# EAGLE board Program Counter (EAGLE 9.5.2)
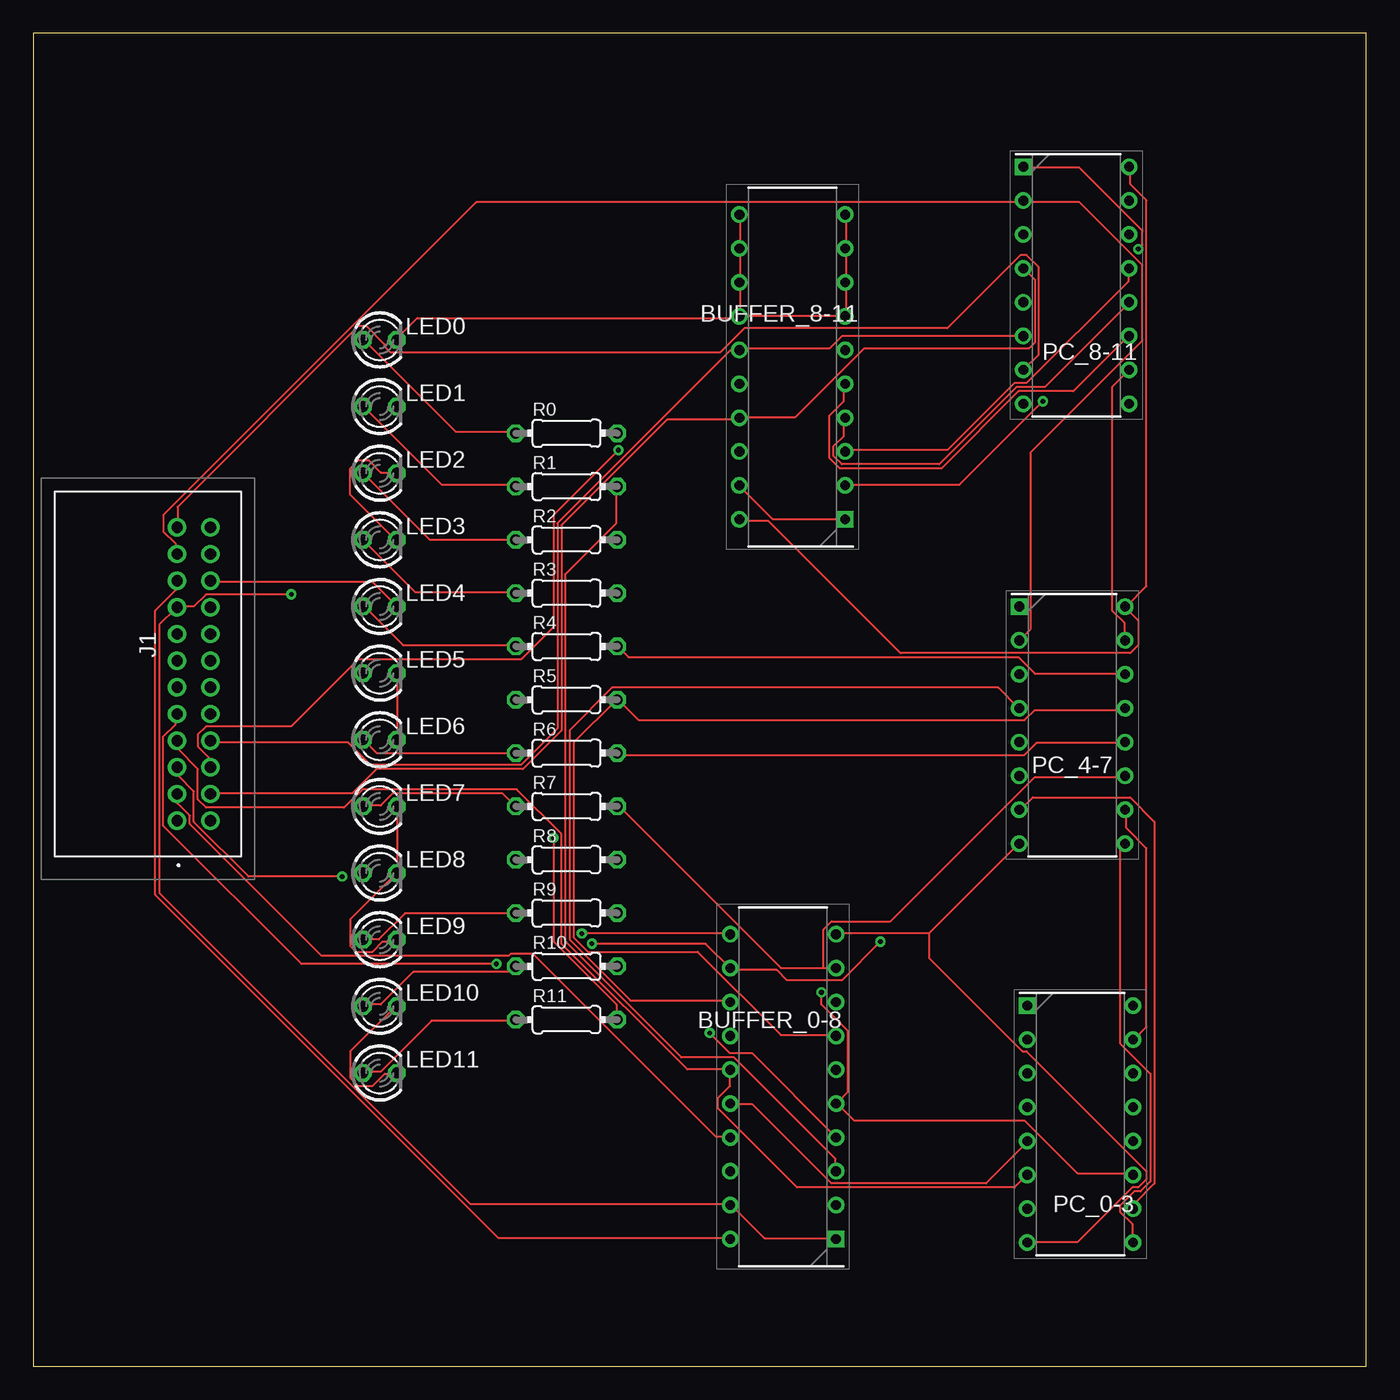
[diagram p0: board, top side]
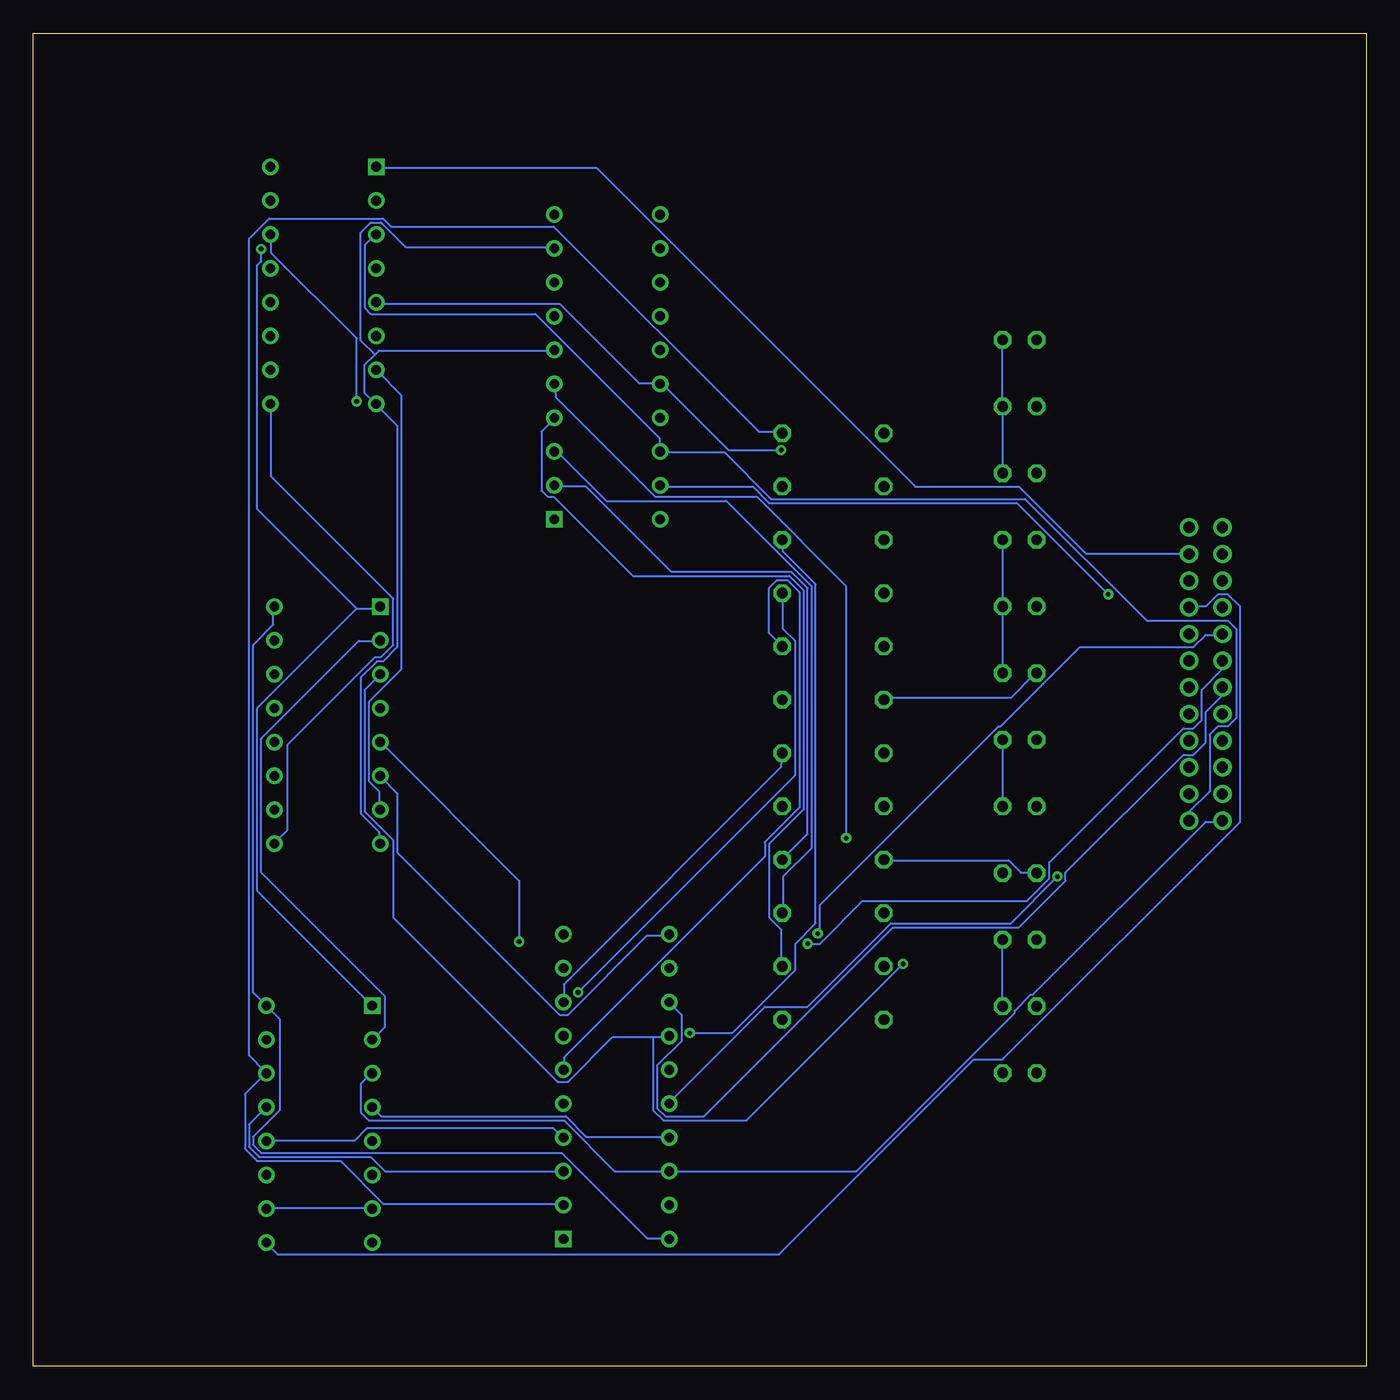
[diagram p1: board, bottom side, seen from below]

Size 100 x 100 mm. Coordinates in mm from the lower left corner, seen from the top.
Outline: 0,0 100,0 100,100 0,100 0,0
Copper layers (1*16): Top 0.035mm / dielectric 1.5mm / Bottom 0.035mm
Design rules "default": minimum track width 6mil, minimum drill 0.35mm, track to track 6mil, track to pad 6mil, pad to pad 6mil, via to via 6mil, smd to smd 6mil, copper to edge 40mil, drill to drill 6mil, minimum pad ring 10mil, minimum via ring 8mil, stop-mask expansion 4mil, vias tented up to drill 0mil, thermal gap 10mil

## Footprints (pad centres in the part's own frame; a part is rotated, then mirrored left to right if it is on the bottom)
DIP794W53P254L2540H508Q20N = drill 0.73 pad 1.13 square: 1 -3.97,11.43 | drill 0.73 pad 1.13: 2 -3.97,8.89; 3 -3.97,6.35; 4 -3.97,3.81; 5 -3.97,1.27; 6 -3.97,-1.27; 7 -3.97,-3.81; 8 -3.97,-6.35; 9 -3.97,-8.89; 10 -3.97,-11.43; 11 3.97,-11.43; 12 3.97,-8.89; 13 3.97,-6.35; 14 3.97,-3.81; 15 3.97,-1.27; 16 3.97,1.27; 17 3.97,3.81; 18 3.97,6.35; 19 3.97,8.89; 20 3.97,11.43
559592430 = drill 0.85 pad 1.381: 1 0,0; 2 0,-2.5; 3 2,0; 4 2,-2.5; 5 4,0; 6 4,-2.5; 7 6,0; 8 6,-2.5; 9 8,0; 10 8,-2.5; 11 10,0; 12 10,-2.5; 13 12,0; 14 12,-2.5; 15 14,0; 16 14,-2.5; 17 16,0; 18 16,-2.5; 19 18,0; 20 18,-2.5; 21 20,0; 22 20,-2.5; 23 22,0; 24 22,-2.5
LED3MM = drill 0.813 octagon: A -1.27,0; K 1.27,0
DIP794W53P254L1930H508Q16N = drill 0.73 pad 1.13 square: 1 -3.97,8.89 | drill 0.73 pad 1.13: 2 -3.97,6.35; 3 -3.97,3.81; 4 -3.97,1.27; 5 -3.97,-1.27; 6 -3.97,-3.81; 7 -3.97,-6.35; 8 -3.97,-8.89; 9 3.97,-8.89; 10 3.97,-6.35; 11 3.97,-3.81; 12 3.97,-1.27; 13 3.97,1.27; 14 3.97,3.81; 15 3.97,6.35; 16 3.97,8.89
0204/7 = drill 0.813 octagon: 1 -3.81,0; 2 3.81,0

## Placement (x,y rotation side)
BUFFER_0-8  SN74HC541N  [DIP794W53P254L2540H508Q20N]  56.25,20.97 180 top
BUFFER_8-11  SN74HC541N  [DIP794W53P254L2540H508Q20N]  56.95,74.97 180 top
J1  55959-2430  [559592430]  10.79,40.93 90 top
LED0  [LED3MM]  26,77 0 top
LED1  YELLOW  [LED3MM]  26,72 0 top
LED2  YELLOW  [LED3MM]  26,67 0 top
LED3  YELLOW  [LED3MM]  26,62 0 top
LED4  YELLOW  [LED3MM]  26,57 0 top
LED5  YELLOW  [LED3MM]  26,52 0 top
LED6  YELLOW  [LED3MM]  26,47 0 top
LED7  YELLOW  [LED3MM]  26,42 0 top
LED8  YELLOW  [LED3MM]  26,37 0 top
LED9  YELLOW  [LED3MM]  26,32 0 top
LED10  YELLOW  [LED3MM]  26,27 0 top
LED11  YELLOW  [LED3MM]  26,22 0 top
PC_0-3  SN74HC161N  [DIP794W53P254L1930H508Q16N]  78.55,18.16 0 top
PC_4-7  SN74HC161N  [DIP794W53P254L1930H508Q16N]  77.95,48.1 0 top
PC_8-11  SN74HC161N  [DIP794W53P254L1930H508Q16N]  78.25,81.1 0 top
R0  220  [0204/7]  40,70 0 top
R1  220  [0204/7]  40,66 0 top
R2  220  [0204/7]  40,62 0 top
R3  220  [0204/7]  40,58 0 top
R4  220  [0204/7]  40,54 0 top
R5  220  [0204/7]  40,50 0 top
R6  220  [0204/7]  40,46 0 top
R7  220  [0204/7]  40,42 0 top
R8  220  [0204/7]  40,38 0 top
R9  220  [0204/7]  40,34 0 top
R10  220  [0204/7]  40,30 0 top
R11  220  [0204/7]  40,26 0 top

## Library data of the parts
BUFFER_0-8 BUFFER_8-11 = SamacSys_Parts; DESCRIPTION: Octal Buffers And Line Drivers With 3-State Outputs; HEIGHT: 5.08mm; MANUFACTURER_NAME: Texas Instruments; MANUFACTURER_PART_NUMBER: SN74HC541N; MOUSER_PART_NUMBER: 595-SN74HC541N; MOUSER_PRICE-STOCK: https://www.mouser.com/Search/Refine.aspx?Keyword=595-SN74HC541N
J1 = SamacSys_Parts; DESCRIPTION: Headers & Wire Housings 24 Ckt R.A. Header; HEIGHT: 11.95mm; MANUFACTURER_NAME: Molex; MANUFACTURER_PART_NUMBER: 55959-2430; MOUSER_PART_NUMBER: 538-55959-2430; MOUSER_PRICE-STOCK: https://www.mouser.com/Search/Refine.aspx?Keyword=538-55959-2430
LED0 LED1-LED11 = led
PC_0-3 PC_4-7 PC_8-11 = SamacSys_Parts; DESCRIPTION: SYNCHRONOUS 4-BIT BINARY COUNTERS; HEIGHT: 5.08mm; MANUFACTURER_NAME: Texas Instruments; MANUFACTURER_PART_NUMBER: SN74HC161N; MOUSER_PART_NUMBER: 595-SN74HC161N; MOUSER_PRICE-STOCK: https://www.mouser.com/Search/Refine.aspx?Keyword=595-SN74HC161N
R0 R1-R11 = rcl; SPICEPREFIX: R

## Nets
B0: BUFFER_0-8.18 J1.1 PC_0-3.3
B1: BUFFER_0-8.17 J1.3 PC_0-3.4
B2: BUFFER_0-8.16 J1.5 PC_0-3.5
B3: BUFFER_0-8.15 J1.7 PC_0-3.6
B4: BUFFER_0-8.14 J1.9 PC_4-7.3
B5: BUFFER_0-8.13 J1.11 PC_4-7.4
B6: BUFFER_0-8.12 J1.13 PC_4-7.5
B7: BUFFER_0-8.11 J1.15 PC_4-7.6
B8: BUFFER_8-11.18 J1.2 PC_8-11.3
B9: BUFFER_8-11.17 J1.4 PC_8-11.4
B10: BUFFER_8-11.16 J1.6 PC_8-11.5
B11: BUFFER_8-11.15 J1.8 PC_8-11.6
CE: J1.23 PC_0-3.7 PC_0-3.10 PC_4-7.7 PC_8-11.7
CLK: J1.21 PC_0-3.2 PC_4-7.2 PC_8-11.2
GND: BUFFER_0-8.10 BUFFER_8-11.6 BUFFER_8-11.7 BUFFER_8-11.8 BUFFER_8-11.9 BUFFER_8-11.10 BUFFER_8-11.11 BUFFER_8-11.12 BUFFER_8-11.13 BUFFER_8-11.14 J1.20 LED0.K LED1.K LED2.K LED3.K LED4.K LED5.K LED6.K LED7.K LED8.K LED9.K LED10.K LED11.K PC_0-3.8 PC_4-7.8 PC_8-11.8
JMP: J1.18 PC_0-3.9 PC_4-7.9 PC_8-11.9
N$2: PC_0-3.15 PC_4-7.10
N$3: PC_4-7.15 PC_8-11.10
N$5: LED0.A R0.1
N$6: LED1.A R1.1
N$7: LED2.A R2.1
N$9: LED3.A R3.1
N$10: LED4.A R4.1
N$11: LED5.A R5.1
N$12: LED6.A R6.1
N$13: LED7.A R7.1
N$14: LED8.A R8.1
N$15: LED9.A R9.1
N$16: LED10.A R10.1
N$17: LED11.A R11.1
PC0: BUFFER_0-8.2 PC_0-3.14 R0.2
PC1: BUFFER_0-8.3 PC_0-3.13 R1.2
PC2: BUFFER_0-8.4 PC_0-3.12 R2.2
PC3: BUFFER_0-8.5 PC_0-3.11 R3.2
PC4: BUFFER_0-8.6 PC_4-7.14 R4.2
PC5: BUFFER_0-8.7 PC_4-7.13 R5.2
PC6: BUFFER_0-8.8 PC_4-7.12 R6.2
PC7: BUFFER_0-8.9 PC_4-7.11 R7.2
PC8: BUFFER_8-11.2 PC_8-11.14 R8.2
PC9: BUFFER_8-11.3 PC_8-11.13 R9.2
PC10: BUFFER_8-11.4 PC_8-11.12 R10.2
PC11: BUFFER_8-11.5 PC_8-11.11 R11.2
PCO: BUFFER_0-8.1 BUFFER_0-8.19 BUFFER_8-11.1 BUFFER_8-11.19 J1.17
RST: J1.22 PC_0-3.1 PC_4-7.1 PC_8-11.1
VCC: BUFFER_0-8.20 BUFFER_8-11.20 J1.19 PC_0-3.16 PC_4-7.16 PC_8-11.16

## Tracks (layer width: path | path; a pad name or v marks a point on that pad's centre or on a via)
B0
  Bottom 0.152: PC_0-3.3 74.68,21.95 75.44,21.18 75.44,19.05 74.83,18.44 60.2,18.44 56.39,14.63 52.43,14.63 BUFFER_0-8.18 38.25,14.63 26.36,26.52 26.36,26.67 25.15,27.89 24.99,27.89 12.04,40.84 10.82,40.84 J1.1
B1
  Top 0.152: J1.3 10.82,42.82 10.82,42.22 11.73,41.3 11.73,40.69 21.64,30.79 35.66,30.79 35.81,30.94 37.49,30.94 51.21,17.22 52.27,17.22 BUFFER_0-8.17
  Bottom 0.152: BUFFER_0-8.17 52.43,17.22 58.52,17.22 60.05,18.75 73.91,18.75 74.52,19.36 PC_0-3.4
B2  (via drill 0.35)
  Top 0.152: BUFFER_0-8.16 52.43,19.66 53.95,19.66 59.89,13.72 71.48,13.72 74.52,16.76 PC_0-3.5 | v23.16,36.73 16.15,36.73 12.04,40.84 12.04,43.13 10.82,44.35 10.82,44.81 J1.5
  Bottom 0.152: v23.16,36.73 26.67,33.22 35.66,33.22 41.91,26.98 45.11,26.98 52.27,19.81 BUFFER_0-8.16
B3
  Top 0.152: PC_0-3.6 74.52,14.33 73.61,13.41 57.3,13.41 51.36,19.36 51.36,20.12 52.27,21.03 52.27,22.1 BUFFER_0-8.15 49.07,22.25 39.62,31.7 39.62,39.93 36.27,43.28 24.69,43.28 23.32,41.91 12.95,41.91 12.34,42.52 12.34,44.81 10.82,46.33 10.82,46.79 J1.7
B4  (via drill 0.35)
  Top 0.152: v34.75,30.18 20.12,30.18 9.75,40.54 9.75,47.24 10.67,48.16 10.67,48.92 J1.9
  Bottom 0.152: 53.49,24.69 56.54,24.69 59.89,21.34 60.66,21.34 73,33.68 73,39.47 75.13,41.6 75.13,50.75 74.07,51.82 PC_4-7.3 | 53.49,24.69 52.43,24.69 BUFFER_0-8.14 | v34.75,30.18 46.48,18.44 52.73,18.44 53.49,19.2 53.49,24.69
B5
  Top 0.152: BUFFER_0-8.13 52.27,27.43 44.81,27.43 40.23,32 40.23,47.7 43.43,50.9 72.39,50.9 73.91,49.38 PC_4-7.4
  Bottom 0.152: J1.11 10.82,50.9 10.82,50.29 12.04,49.07 12.04,46.79 12.95,45.87 13.72,45.87 22.55,37.03 22.55,36.42 26.06,32.92 35.51,32.92 49.68,18.75 52.58,18.75 53.19,19.36 53.19,22.55 51.36,24.38 51.36,26.36 52.27,27.28 BUFFER_0-8.13
B6  (via drill 0.35)
  Top 0.152: v63.55,31.85 60.66,28.96 56.54,28.96 55.78,29.72 52.43,29.72 BUFFER_0-8.12 50.44,31.7 v41.91,31.7
  Bottom 0.152: v63.55,31.85 63.55,36.42 73.91,46.79 PC_4-7.5 | v41.91,31.7 41,31.7 37.8,34.9 25.45,34.9 23.77,36.58 23.77,37.8 13.72,47.85 12.95,47.85 12.34,48.46 12.34,50.75 10.82,52.27 10.82,52.88 J1.13
B7  (via drill 0.35)
  Top 0.152: v41.15,32.46 52.27,32.46 BUFFER_0-8.11
  Bottom 0.152: BUFFER_0-8.11 52.43,32.31 53.95,32.31 59.89,26.36 60.5,26.36 72.69,38.56 72.69,42.98 73.91,44.2 PC_4-7.6 | v41.15,32.46 41,32.61 41,34.59 27.58,48.01 27.43,48.01 21.49,53.95 12.95,53.95 12.04,54.86 10.82,54.86 J1.15
B8
  Bottom 0.152: PC_8-11.3 74.37,84.89 75.13,84.12 75.13,79.4 74.68,78.94 62.33,78.94 53.03,69.65 53.03,68.73 BUFFER_8-11.18 52.88,68.58 48.16,68.58 44.65,65.08 25.6,65.08 16.46,55.93 10.36,55.93 9.75,55.32 9.75,48.62 10.36,48.01 11.12,48.01 11.73,47.4 11.73,43.13 13.26,41.6 13.26,41 J1.2
B9
  Top 0.152: PC_8-11.4 74.37,82.3 75.13,81.53 75.13,76.81 74.68,76.35 62.33,76.35 57.15,71.17 53.03,71.17 BUFFER_8-11.17 52.88,71.02 47.55,71.02 39.62,63.09 39.62,47.7 36.73,44.81 25.76,44.81 23.93,42.98 13.41,42.98 J1.4
B10  (via drill 0.35)
  Top 0.152: v43.89,68.73 39.01,63.86 39.01,55.47 36.58,53.03 24.38,53.03 19.36,48.01 12.95,48.01 12.34,47.4 12.34,46.48 13.26,45.57 13.26,44.96 J1.6
  Bottom 0.152: PC_8-11.5 74.22,79.7 60.5,79.7 54.56,73.76 53.03,73.76 BUFFER_8-11.16 52.88,73.76 47.85,68.73 v43.89,68.73
B11
  Top 0.152: PC_8-11.6 74.22,77.27 60.66,77.27 59.74,76.35 53.03,76.35 BUFFER_8-11.15 52.88,76.2 52.27,76.2 39.32,63.25 39.32,47.85 36.58,45.11 25.3,45.11 23.62,46.79 13.41,46.79 J1.8
CE
  Top 0.152: J1.23 10.82,62.94 10.82,64.47 24.38,78.03 24.99,78.03 26.36,76.66 26.36,76.5 26.82,76.05 51.51,76.05 53.34,77.88 68.58,77.88 74.07,83.36 74.52,83.36 75.44,82.45 75.44,75.89 74.37,74.83 PC_8-11.7 | PC_0-3.10 82.6,11.89 82.6,12.19 84.12,13.72 84.12,40.84 82.3,42.67 74.98,42.67 74.07,41.76 PC_4-7.7
  Bottom 0.152: PC_0-3.7 74.68,11.89 82.45,11.89 PC_0-3.10 | PC_4-7.7 74.07,41.76 74.07,43.13 74.83,43.89 74.83,49.84 72.39,52.27 72.39,72.85 74.22,74.68 PC_8-11.7
CLK
  Top 0.152: PC_4-7.2 74.07,54.56 74.83,55.32 74.83,68.58 83.21,76.96 83.21,82.6 78.49,87.33 74.37,87.33 PC_8-11.2 74.22,87.33 33.22,87.33 9.75,63.86 9.75,62.64 10.67,61.72 10.67,60.96 J1.21
  Bottom 0.152: PC_4-7.2 74.07,54.41 75.59,54.41 82.91,47.09 82.91,37.03 73.61,27.74 73.61,25.45 74.52,24.54 PC_0-3.2
GND
  Top 0.152: 67.21,32.46 60.35,32.46 BUFFER_0-8.10 | 67.21,32.46 73.91,39.17 PC_4-7.8 | 67.21,32.46 67.21,30.63 74.22,23.62 74.52,23.62 83.52,14.63 83.52,14.02 82.91,13.41 82.45,13.41 78.33,9.3 74.68,9.3 PC_0-3.8 | 53.03,78.79 53.03,81.23 BUFFER_8-11.13 53.03,81.38 53.03,83.82 BUFFER_8-11.12 53.03,83.97 53.03,86.26 BUFFER_8-11.11 | BUFFER_8-11.10 60.96,86.26 60.96,83.97 BUFFER_8-11.9 60.96,83.82 60.96,81.38 BUFFER_8-11.8 60.96,81.23 60.96,78.79 BUFFER_8-11.7 60.81,78.79 53.03,78.79 | 53.03,78.79 BUFFER_8-11.14 52.88,78.64 28.8,78.64 27.28,77.11 LED0.K | LED11.K 27.13,21.95 26.36,21.95 25.45,21.03 24.38,21.03 23.77,21.64 23.77,23.62 27.13,26.98 LED10.K | LED7.K 27.28,41.91 27.28,37.03 LED8.K 27.13,36.88 23.77,33.53 23.77,31.55 24.23,31.09 25.45,31.09 26.21,31.85 27.13,31.85 LED9.K | LED6.K 27.28,47.09 27.28,51.97 LED5.K | J1.20 13.41,58.83 25.45,58.83 27.13,57.15 LED4.K | LED2.K 27.13,67.06 26.06,67.06 25.15,67.97 24.38,67.97 23.77,67.36 23.77,65.38 27.13,62.03 LED3.K
  Bottom 0.152: 74.37,75.89 75.13,75.13 75.13,73 74.37,72.24 PC_8-11.8 74.22,72.08 72.69,70.56 72.69,53.95 73.76,52.88 74.22,52.88 75.44,51.66 75.44,41.45 74.07,40.08 74.07,39.32 PC_4-7.8 | 74.37,75.89 74.07,76.2 60.96,76.2 BUFFER_8-11.6 | 74.37,75.89 75.44,76.96 75.44,85.04 74.68,85.8 73.91,85.8 72.08,83.97 60.96,83.97 BUFFER_8-11.9 | LED9.K 27.28,31.85 27.28,27.13 LED10.K | LED7.K 27.28,42.06 27.28,46.94 LED6.K | LED2.K 27.28,67.06 27.28,71.93 LED1.K 27.28,72.08 27.28,76.96 LED0.K | LED3.K 27.28,61.87 27.28,57.15 LED4.K 27.28,52.12 LED5.K
JMP
  Top 0.152: PC_0-3.9 82.45,9.3 82.45,10.67 81.53,11.58 81.53,12.04 82.6,13.11 83.06,13.11 83.82,13.87 83.82,21.95 81.53,24.23 81.53,38.86 81.84,39.17 PC_4-7.9
  Bottom 0.152: PC_8-11.9 82.14,72.08 82.14,66.75 73,57.61 73,54.1 73.91,53.19 74.37,53.19 80.92,46.63 80.92,40.23 81.84,39.32 PC_4-7.9 | J1.18 13.26,57 12.04,57 11.12,57.91 10.36,57.91 9.45,57 9.45,40.84 27.28,23.01 29.41,23.01 44.04,8.38 81.69,8.38 82.45,9.14 PC_0-3.9
N$2
  Top 0.152: PC_4-7.10 81.99,41.6 81.99,40.39 83.52,38.86 83.52,25.45 82.6,24.54 PC_0-3.15
N$3
  Top 0.152: PC_4-7.15 81.84,54.56 81.84,55.78 80.92,56.69 80.92,73.46 82.14,74.68 PC_8-11.10
N$5
  Top 0.152: R0.1 36.12,70.1 31.7,70.1 24.84,76.96 LED0.A
N$6
  Top 0.152: R1.1 36.12,66.14 30.63,66.14 24.84,71.93 LED1.A
N$7
  Top 0.152: R2.1 36.12,62.03 29.72,62.03 24.84,66.9 LED2.A
N$9
  Top 0.152: R3.1 36.12,58.06 28.65,58.06 24.84,61.87 LED3.A
N$10
  Top 0.152: R4.1 36.12,54.1 27.74,54.1 24.84,57 LED4.A
N$11
  Bottom 0.152: R5.1 36.12,50.14 26.67,50.14 24.84,51.97 LED5.A
N$12
  Top 0.152: R6.1 36.12,46.02 25.76,46.02 24.84,46.94 LED6.A
N$13
  Top 0.152: LED7.A 24.84,42.06 26.06,42.06 26.98,42.98 35.2,42.98 36.12,42.06 R7.1
N$14
  Bottom 0.152: LED8.A 24.84,37.03 25.91,37.03 26.82,37.95 36.12,37.95 R8.1
N$15
  Top 0.152: LED9.A 24.84,32 25.91,32 27.89,33.98 36.12,33.98 R9.1
N$16
  Top 0.152: LED10.A 24.84,27.13 26.06,27.13 28.5,29.57 35.81,29.57 36.12,29.87 R10.1
N$17
  Top 0.152: LED11.A 24.84,22.1 26.06,22.1 29.87,25.91 36.12,25.91 R11.1
PC0
  Bottom 0.152: BUFFER_0-8.2 60.35,12.19 73.76,12.19 76.96,15.39 83.21,15.39 84.12,16.31 84.12,20.42 82.6,21.95 PC_0-3.14 82.6,22.1 83.82,23.32 83.82,84.58 82.3,86.11 73.76,86.11 73.15,85.5 60.96,85.5 45.57,70.1 43.89,70.1 R0.2
PC1
  Top 0.152: R1.2 43.74,65.99 43.74,63.25 39.93,59.44 39.93,31.85 48.62,23.16 52.58,23.16 60.2,15.54 60.2,14.63 BUFFER_0-8.3
  Bottom 0.152: BUFFER_0-8.3 60.35,14.63 73.61,14.63 74.68,15.7 83.06,15.7 83.82,16.46 83.82,18.14 82.6,19.36 PC_0-3.13
PC2  (via drill 0.35)
  Top 0.152: v50.75,24.99 52.27,23.47 53.95,23.47 60.2,17.22 BUFFER_0-8.4
  Bottom 0.152: PC_0-3.12 82.45,16.92 75.89,16.92 74.98,17.83 60.96,17.83 60.35,17.22 BUFFER_0-8.4 | v50.75,24.99 47.55,24.99 42.82,29.72 42.82,31.7 41.3,33.22 41.3,58.67 43.74,61.11 43.74,61.87 R2.2
PC3  (via drill 0.35)
  Top 0.152: PC_0-3.11 82.45,14.48 78.33,14.48 74.37,18.44 61.57,18.44 60.35,19.66 BUFFER_0-8.5 60.35,19.81 61.11,20.57 61.11,25.15 59.13,27.13 v59.13,28.04
  Bottom 0.152: v59.13,28.04 42.82,44.35 42.82,54.41 43.74,55.32 43.74,57.91 R3.2
PC4
  Top 0.152: PC_4-7.14 81.84,51.97 75.13,51.97 73.91,53.19 44.65,53.19 43.89,53.95 R4.2
  Bottom 0.152: BUFFER_0-8.6 60.2,22.25 60.2,23.16 45.11,38.25 45.11,39.32 42.52,41.91 42.52,58.06 43.43,58.98 44.2,58.98 44.81,58.37 44.81,55.02 43.89,54.1 R4.2
PC5
  Top 0.152: BUFFER_0-8.7 60.2,24.84 56.08,24.84 49.84,31.09 41.6,31.09 40.54,32.16 40.54,46.79 43.74,49.99 R5.2 43.89,49.99 45.41,48.46 74.37,48.46 75.13,49.23 81.84,49.23 PC_4-7.13
PC6
  Top 0.152: PC_4-7.12 81.84,46.79 75.29,46.79 74.37,45.87 43.89,45.87 R6.2
  Bottom 0.152: BUFFER_0-8.8 60.2,27.43 60.2,28.65 43.89,44.96 43.89,45.87 R6.2
PC7
  Top 0.152: 59.28,29.87 56.08,29.87 43.89,42.06 R7.2 | 59.28,29.87 60.2,29.87 BUFFER_0-8.9 | 59.28,29.87 59.28,32.77 59.89,33.38 64.31,33.38 75.13,44.2 81.84,44.2 PC_4-7.11
PC8  (via drill 0.35)
  Top 0.152: v75.74,72.39 69.49,66.14 60.96,66.14 BUFFER_8-11.2
  Bottom 0.152: BUFFER_8-11.2 60.81,65.99 58.52,65.99 52.12,59.59 43.13,59.59 41.91,58.37 41.91,39.93 43.74,38.1 R8.2 | v75.74,72.39 75.74,77.11 82.14,83.52 82.14,84.89 PC_8-11.14
PC9
  Top 0.152: BUFFER_8-11.3 60.96,68.73 68.58,68.73 73.61,73.76 74.52,73.76 82.14,81.38 82.14,82.3 PC_8-11.13
  Bottom 0.152: R9.2 43.74,34.14 43.74,36.73 41.6,38.86 41.6,58.52 48.01,64.92 57,64.92 60.81,68.73 BUFFER_8-11.3
PC10
  Top 0.152: BUFFER_8-11.4 60.81,71.02 60.81,69.8 60.05,69.04 60.05,68.28 60.66,67.67 67.97,67.67 73.76,73.46 75.89,73.46 82.14,79.7 PC_8-11.12
  Bottom 0.152: R10.2 43.89,30.02 43.89,32.77 44.81,33.68 44.81,39.17 42.22,41.76 42.22,58.22 43.28,59.28 55.02,59.28 60.96,65.23 61.42,65.23 61.87,65.68 61.87,70.1 60.96,71.02 BUFFER_8-11.4
PC11  (via drill 0.35)
  Top 0.152: BUFFER_8-11.5 60.81,73.61 60.81,72.39 59.74,71.32 59.74,68.12 60.5,67.36 68.12,67.36 73.91,73.15 78.03,73.15 82.14,77.27 PC_8-11.11 | v39.01,39.62 39.01,31.85 43.74,27.13 43.74,26.06 R11.2
  Bottom 0.152: v39.01,39.62 39.01,58.52 45.72,65.23 53.34,65.23 60.81,72.69 60.81,73.61 BUFFER_8-11.5
PCO  (via drill 0.35)
  Top 0.152: BUFFER_0-8.1 60.2,9.6 54.86,9.6 52.43,12.04 BUFFER_0-8.19 52.27,12.19 32.77,12.19 9.45,35.51 9.45,55.63 10.67,56.84 J1.17 10.82,57 12.04,57 12.95,57.91 v19.36,57.91 | BUFFER_8-11.1 60.81,63.55 55.47,63.55 53.03,65.99 BUFFER_8-11.19
  Bottom 0.152: v19.36,57.91 26.21,64.77 44.81,64.77 46.02,65.99 52.88,65.99 BUFFER_8-11.19
RST  (via drill 0.35)
  Top 0.152: v82.91,83.82 83.21,84.12 83.21,85.19 78.49,89.92 74.37,89.92 PC_8-11.1
  Bottom 0.152: 75.74,56.84 74.07,56.84 PC_4-7.1 | 75.74,56.84 83.21,49.38 83.21,35.66 74.68,27.13 PC_0-3.1 | v82.91,83.82 82.91,82.91 83.21,82.6 83.21,64.31 75.74,56.84 | J1.22 13.41,60.96 21.03,60.96 26.06,65.99 33.83,65.99 57.76,89.92 74.22,89.92 PC_8-11.1
VCC
  Top 0.152: BUFFER_8-11.20 53.03,63.4 55.17,63.4 65.08,53.49 82.3,53.49 82.91,54.1 82.91,55.93 81.99,56.84 PC_4-7.16 81.99,57 83.52,58.52 83.52,87.48 82.3,88.7 82.3,89.92 PC_8-11.16 | J1.19 10.67,58.83 10.67,58.22 9.14,56.69 9.14,35.36 34.9,9.6 52.27,9.6 BUFFER_0-8.20
  Bottom 0.152: BUFFER_0-8.20 52.43,9.6 53.95,9.6 60.35,16 82.91,16 83.52,16.61 83.52,17.22 81.53,19.2 81.53,26.06 82.45,26.98 PC_0-3.16 82.6,27.13 83.52,28.04 83.52,54.1 81.99,55.63 81.99,56.84 PC_4-7.16